# Altium PCB Laadstation.PcbDoc
Units mm, origin at the board's own origin, x right, y up, seen from the top; angles counter-clockwise.
Board outline 40.78 x 39.58 mm, 2 copper layers (Top Layer, Bottom Layer), stack 1.569 mm thick; 49 components, 36 nets, 217 pads, 36 vias.
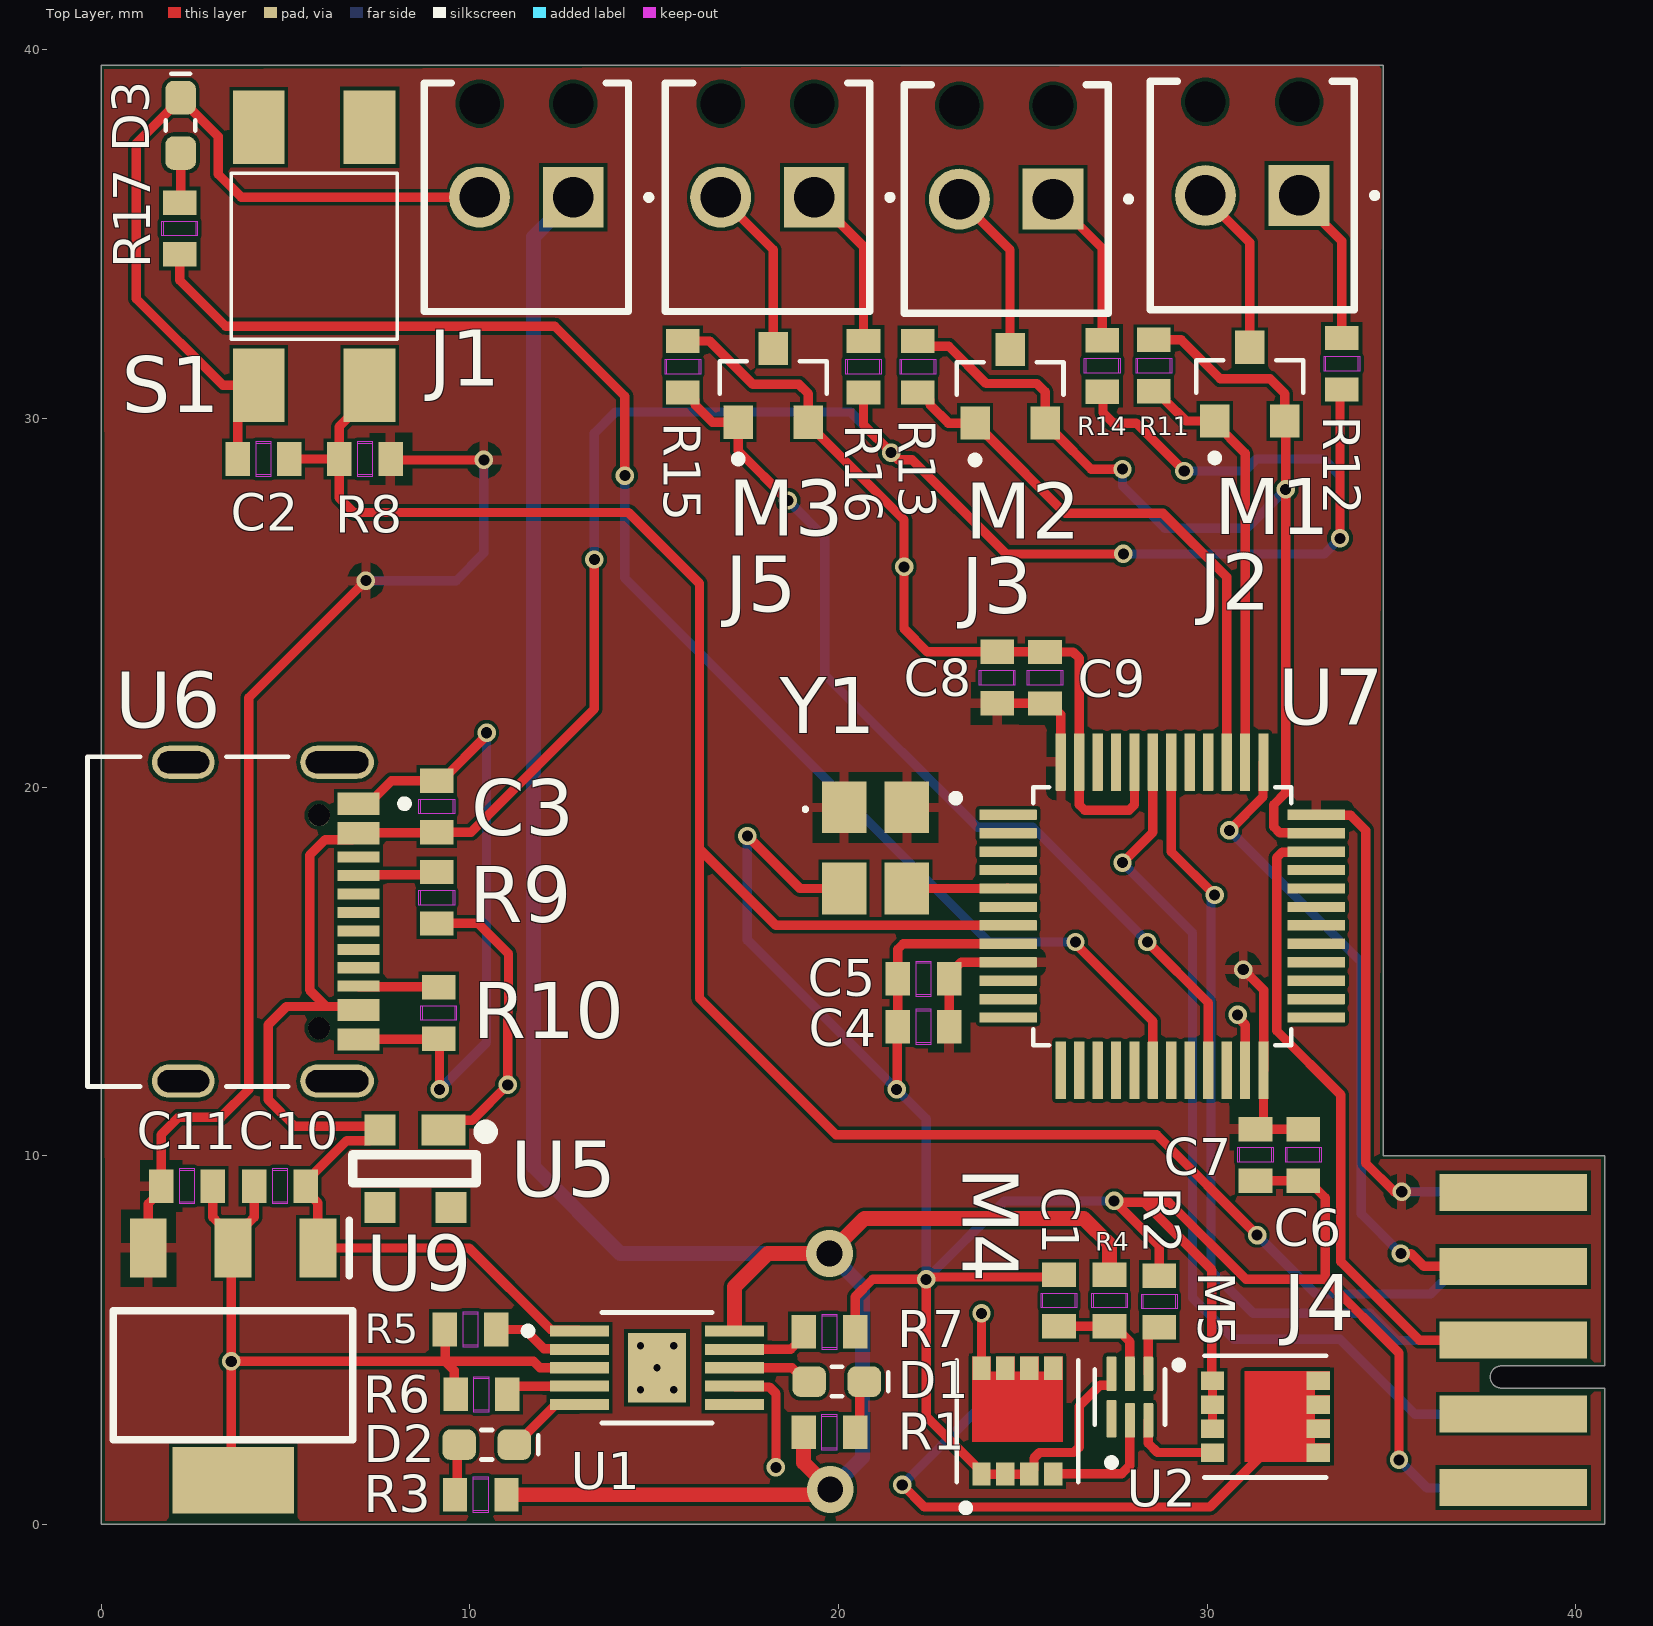
[diagram p0: Top Layer view]
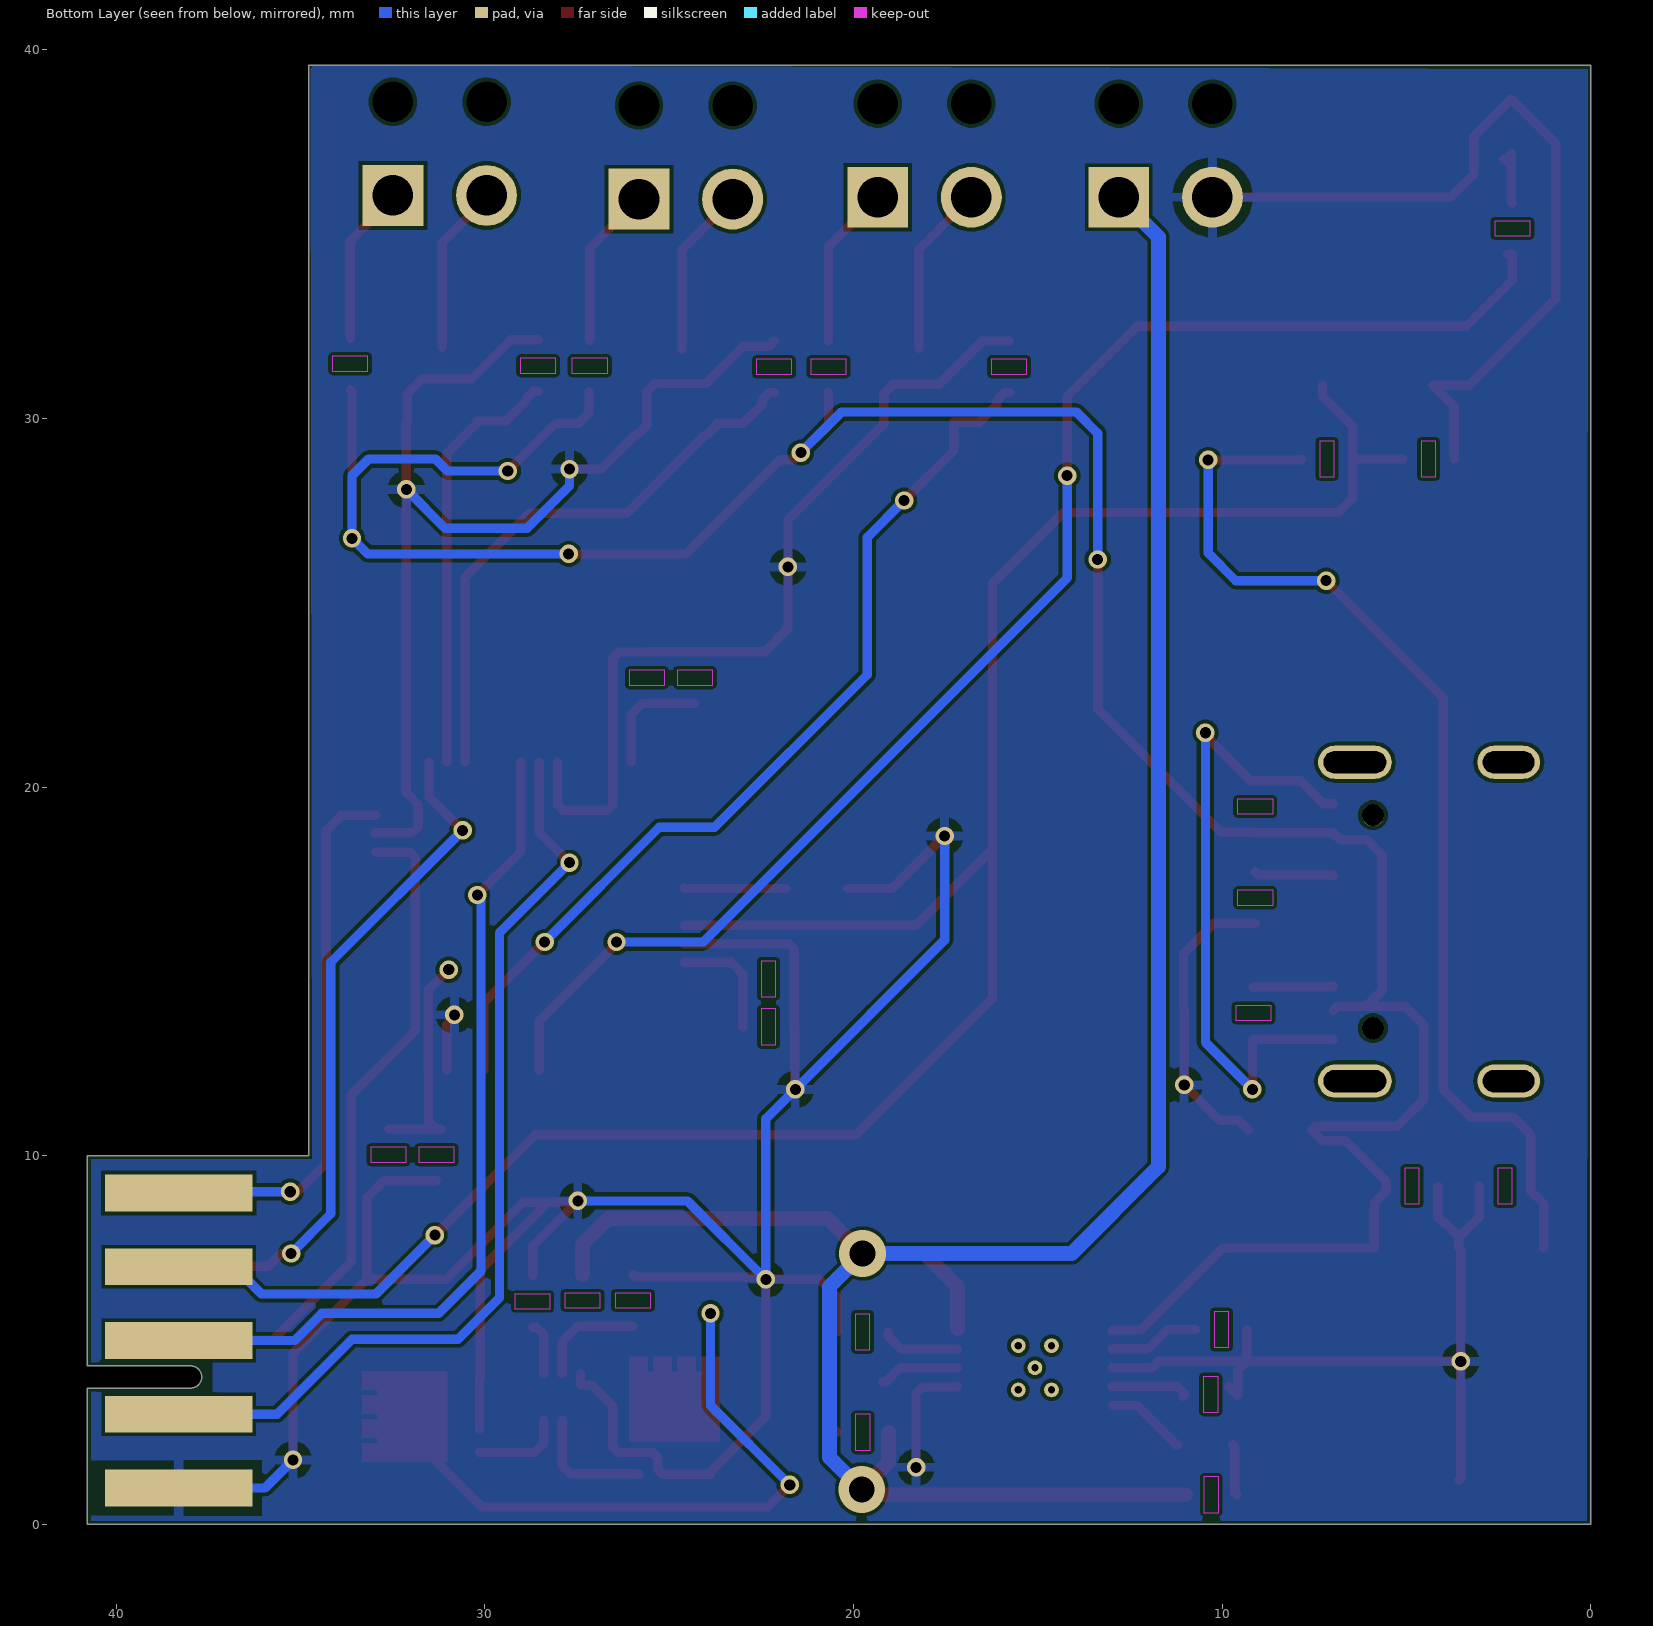
[diagram p1: Bottom Layer view, seen from below]
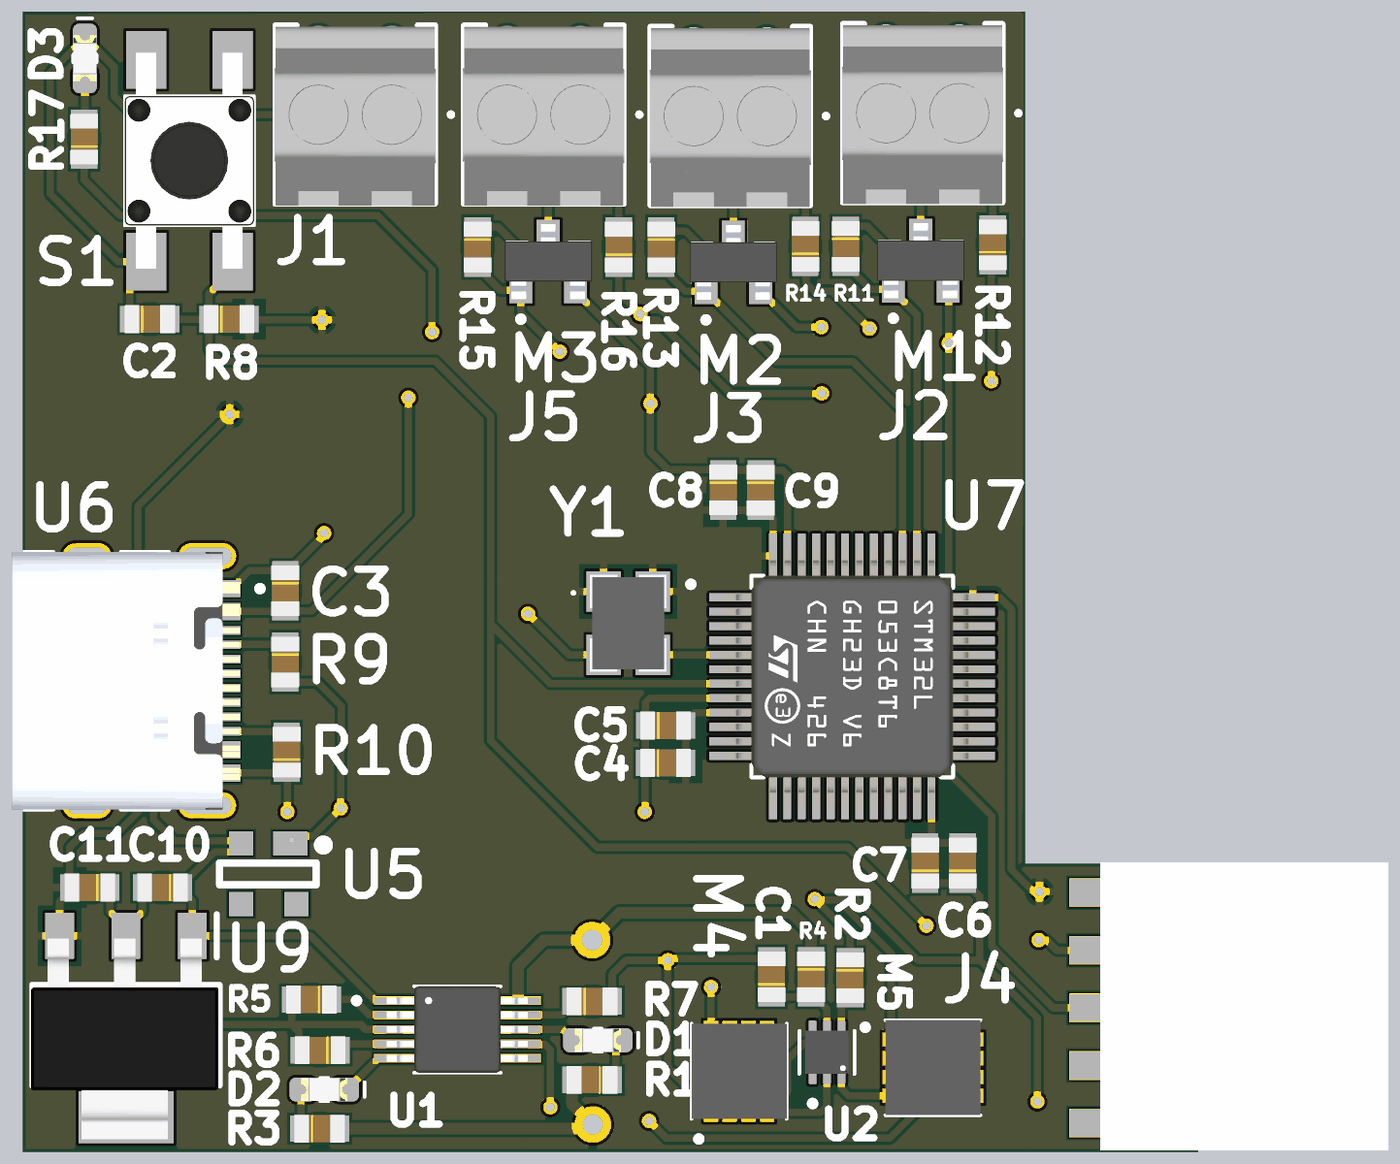
[diagram p2: 3D render of the assembled board from above, using the file's embedded part models]

## Layer stack, top to bottom
Top Solder: solder mask 0.0254, SM-001, Dk 4
Top Layer: signal copper 0.035
Dielectric 1: core 1.4986, Core-043, Dk 4.3
Bottom Layer: signal copper 0.035
Bottom Solder: solder mask 0.0254, SM-001, Dk 4

## Board outline
0,0 0,39.575 34.775,39.575 34.775,10 40.775,10 40.775,4.3 37.975,4.3 ccw(c37.975,4) 37.675,4 ccw(c37.975,4) 37.975,3.7 40.775,3.7 40.775,0 34.775,0

## Design rules (kind name [scope] priority, off if disabled: settings)
Clearance [All] p1: gap=0.1 ignorepadtopadclearanceinfootprint=FALSE
MinimumSolderMaskSliver [All] p1: minsoldermaskwidth=0.1
PolygonConnect [All] p1: connectstyle=Relief reliefconductorwidth=0.254 reliefentries=4 polygonreliefangle="90 Angle" airgapwidth=0.254
RoutingVias [All] p1: holewidth=0.711 width=1.27 viastyle="Through Hole" minholewidth=0.3 minwidth=0.5 maxholewidth=0.711 maxwidth=1.27
SilkToSilkClearance [All] p1: silktosilkclearance=0.05
SolderMaskExpansion [All] p1: expansion=0.102 istentingtop=FALSE
SupplyNets "Schematic Supply Nets_4" [InNet('VDD')] p1: voltage=0.000
SupplyNets "Schematic Supply Nets_3" [InNet('Battery')] p2: voltage=0.000
SupplyNets "Schematic Supply Nets_1" [InNet('VSS')] p3: voltage=0.000
SupplyNets "Schematic Supply Nets" [InNet('+5V')] p4: voltage=0.000
Width [All] p1: maxlimit=0.4 minlimit=0.254 preferedwidth=0.4
28 further rules are at their usual default settings.

## Classes and differential pairs
component class Oplader: C1 D1 D2 J1 M4 M5 R1 R2 R3 R4 R5 R6 R7 U1 U2
component class Laadstation: C2 C3 C4 C5 C6 C7 C8 C9 C10 C11 D3 J2 J3 J4 J5 M1 M2 M3 R8 R9 R10 R11 R12 R13 R14 R15 R16 R17 S1 U5 U6 U7 U9 Y1

## Components (designator, comment, footprint, x,y, rotation, side; value= is the part's Value field where it differs from the comment)
C1 "100nF" 0603 25.975,5.375 r90 top
C2 "100n" 0603 3.7,28.9 r0 top
C3 "1µF" 0603 9.1,20.175 r270 top
C4 "1µF" 0603 21.6,13.5 r0 top
C5 "100nF" 0603 21.603,14.8 r0 top
C6 "1µF" 0603 32.607,9.327 r90 top
C7 "100nF" 0603 31.307,9.327 r90 top
C8 "1µF" 0603 24.3,23.669 r270 top
C9 "100nF" 0603 25.6,23.666 r270 top
C10 "100nF" 0603 5.547,9.175 r180 top
C11 "10µF" 0603 3.022,9.175 r180 top
D1 "LED" LED 19.95,3.875 r180 top
D2 "LED" LED 10.455,2.163 r180 top
D3 "LED" LED 2.15,37.95 r270 top
J1 "MPT 0,5 2-2,54" "MPT 0,5 2-2,54" 12.8,36 r180 top
J2 "MPT 0,5 2-2,54" "MPT 0,5 2-2,54" 32.49,36.05 r180 top
J3 "MPT 0,5 2-2,54" "MPT 0,5 2-2,54" 25.815,35.95 r180 top
J4 "STLINK-V3MINIE" STLINK-V3MINIE 40.8,4 r180 top
J5 "MPT 0,5 2-2,54" "MPT 0,5 2-2,54" 19.34,36 r180 top
M1 "BSS316N" BSS316N 31.15,30.931 r90 top
M2 "BSS316N" BSS316N 24.65,30.875 r90 top
M3 "BSS316N" BSS316N 18.225,30.9 r90 top
M4 "CSD16406Q3" CSD16406Q3 24.85,2.8 r90 top
M5 "CSD16406Q3" CSD16406Q3 31.575,2.925 r0 top
R1 "1k5" 0603 20.447,2.5 r180 top
R2 "2k2" 0603 28.7,6.747 r270 top
R3 "1k5" 0603 9.595,0.805 r0 top
R4 "330R" 0603 27.35,6.775 r270 top
R5 "1k" 0603 10.712,5.29 r180 top
R6 "2k" 0603 11.009,3.529 r180 top
R7 "10k" 0603 19.05,5.225 r0 top
R8 "4k7" 0603 6.45,28.9 r0 top
R9 "5k1" 0603 9.1,17.7 r270 top
R10 "5k1" 0603 9.15,13.175 r90 top
R11 "weerstand" 0603 28.55,32.131 r270 top
R12 "39R" 0603 33.65,30.784 r90 top
R13 "weerstand" 0603 22.15,32.1 r270 top
R14 "39R" 0603 27.15,30.728 r90 top
R15 "weerstand" 0603 15.775,32.1 r270 top
R16 "39R" 0603 20.675,30.703 r90 top
R17 "330R" 0603 2.125,34.453 r90 top
S1 "button" BUTTON 5.775,34.3 r90 top
U1 "BQ24092DGQR" BQ24092DGQR 15.075,4.25 r0 top
U2 "BQ29700DSER" BQ29700DSER 27.9,3.455 r90 top
U5 "esd_ic" ESD_IC 8.525,9.65 r180 top
U6 "usb-c" USB-C 4.6,16.35 r270 top
U7 "STM32L053C8T6" STM32L053C8T6 28.775,16.5 r0 top
U9 "NCV4274C" NCV4274C 5.875,7.5 r270 top
Y1 "AU-24.000MBE-T" AU-24.000MBE-T 21,18.35 r270 top

## Footprints (in the part's own frame and the unit in brackets; to place one, negate y for a bottom-side part, rotate by r counter-clockwise, add the part's x,y. Pads: shape width x height; smd on the part's side, far side on the other; paste and mask are expansions set on the pad)
0603 [mil]
  rect 26x36 smd paste+0 mask+0: 1(0,0) 2(55,0)
  Top Layer keep-out region: 19.68,-17 19.68,17 35.43,17 35.43,-17
  Keep-Out Layer region: 19.68,-19 19.68,19 35.43,19 35.43,-19
  body extent -7,-19 62,19, height 35
AU-24.000MBE-T [mm]
  rect 1.4x1.2 smd: 1(-1.1,-0.85) 2(1.1,-0.85) 3(1.1,0.85) 4(-1.1,0.85)
  silkscreen extent -1.1,-1.95 -1,-1.85, body extent -1.68,-1.33 1.68,1.33, height 1.2
BQ24092DGQR [mm]
  rect 1.6x0.3 smd paste-0.025 mask+0.05: 1(-2.1,1) 2(-2.1,0.5) 3(-2.1,0) 4(-2.1,-0.5) 5(-2.1,-1) 6(2.1,-1) 7(2.1,-0.5) 8(2.1,0) 9(2.1,0.5) 10(2.1,1)
  rect 1.57x1.88 smd: 11(0,0)
  round 0.4 hole 0.2 mask+0: 12(-0.45,0.6) 13(0.45,0.6) 14(0,0) 15(-0.45,-0.6) 16(0.45,-0.6)
  silkscreen extent -3.6,-1.5 1.5,1.5, body extent -2.45,-1.5 2.45,1.5, height 1.1
BQ29700DSER [mm]
  rrect25% 1.02x0.27 smd: 1(-0.59,0.5)
  rrect25% 0.94x0.27 smd: 2(-0.63,0) 3(-0.63,-0.5) 4(0.63,-0.5) 5(0.63,0) 6(0.63,0.5)
  silkscreen extent -1.87,-0.95 0.75,0.96, body extent -0.75,-0.75 0.75,0.75, height 0.8
BSS316N [mm]
  rect 0.9x0.8 smd: 1(-1,0.95) 2(-1,-0.95) 3(1,0)
  silkscreen extent -2.1,-1.45 0.65,1.45, body extent -1.3,-1.53 1.3,1.52, height 1.3
BUTTON [mm]
  rect 2x1.4 smd: A1(-3.4,1.5) A2(3.6,1.5) B1(-3.4,-1.5) B2(3.6,-1.5)
  silkscreen extent -2.15,-2.25 2.35,2.25, body extent -3.65,-2.25 3.85,2.25, height 3.8
CSD16406Q3 [mm]
  rect 0.63x0.5 smd paste-1: 1(-1.435,0.975) 2(-1.435,0.325) 3(-1.435,-0.325) 4(-1.435,-0.975)
  rect 0.63x0.5 smd paste-1 mask+0: 5(1.435,-0.975) 6(1.435,-0.325) 7(1.435,0.325) 8(1.435,0.975)
  Top Layer region: 1.75,0.725 1.34,0.725 1.34,0.575 1.75,0.575 1.75,0.075 1.34,0.075 1.34,-0.075 1.75,-0.075 1.75,-0.575 1.34,-0.575 1.34,-0.725 1.75,-0.725 1.75,-1.225 -0.56,-1.225 -0.56,1.225 1.75,1.225
  silkscreen extent -2.45,-1.65 1.65,1.65, body extent -1.65,-1.65 1.65,1.65, height 1.1
ESD_IC [mil]
  rect 47x33 smd paste+0 mask+2: 1(-29.92,-41.34)
  rect 33x33 smd paste+0 mask+2: 2(37.8,-41.34) 3(37.8,41.34) 4(-37.79,41.34)
  silkscreen extent -80,-45 67,15
LED [mm]
  rrect53% 0.91x0.83 smd: A(0.75,0) C(-0.75,0)
  silkscreen extent -1.4,-0.4 0.14,0.4, body extent -0.8,-0.4 0.8,0.4, height 0.7
"MPT 0,5 2-2,54" [mm]
  rect 1.65x1.65 hole 1.1: 1(0,0)
  round 1.65 hole 1.1: 2(2.54,0)
  round 0.55 hole 1.1 unplated: MH1(0,-2.54) MH2(2.54,-2.54)
  silkscreen extent -2.1,-3.1 4.04,3.1, body extent -1.53,-3.05 4.07,3.15, height 8.5
NCV4274C [mm]
  rect 1.6x1 smd: 1(0,0) 2(0,-2.3) 3(0,-4.6)
  rect 1.8x3.3 smd: 4(6.3,-2.3)
  silkscreen extent -0.75,-5.55 5.2,0.95, body extent 0.09,-5.59 7.05,0.91, height 1.65
STLINK-V3MINIE [mm]
  rect 4x1 smd paste-0.025 mask+0.05: 1(2.5,3) 2(2.5,1) 3(2.5,-1) 4(2.5,-3) 5(2.5,-5)
  rect 4x1 smd far side paste-0.025 mask+0.05: 6(2.504,3.01) 7(2.504,1.01) 8(2.504,-0.99) 9(2.504,-2.99) 10(2.504,-4.99)
  body extent -6.57,-6.05 3.43,3.95, height 2.3
STM32L053C8T6 [mm]
  rrect7% 1.56x0.28 smd: 1(-4.18,2.75) 2(-4.18,2.25) 3(-4.18,1.75) 4(-4.18,1.25) 5(-4.18,0.75) 6(-4.18,0.25) 7(-4.18,-0.25) 8(-4.18,-0.75) 9(-4.18,-1.25) 10(-4.18,-1.75) 11(-4.18,-2.25) 12(-4.18,-2.75) 25(4.18,-2.75) 26(4.18,-2.25) 27(4.18,-1.75) 28(4.18,-1.25) 29(4.18,-0.75) 30(4.18,-0.25) 31(4.18,0.25) 32(4.18,0.75) 33(4.18,1.25) 34(4.18,1.75) 35(4.18,2.25) 36(4.18,2.75)
  rrect7% 0.28x1.56 smd: 13(-2.75,-4.18) 14(-2.25,-4.18) 15(-1.75,-4.18) 16(-1.25,-4.18) 17(-0.75,-4.18) 18(-0.25,-4.18) 19(0.25,-4.18) 20(0.75,-4.18) 21(1.25,-4.18) 22(1.75,-4.18) 23(2.25,-4.18) 24(2.75,-4.18) 37(2.75,4.18) 38(2.25,4.18) 39(1.75,4.18) 40(1.25,4.18) 41(0.75,4.18) 42(0.25,4.18) 43(-0.25,4.18) 44(-0.75,4.18) 45(-1.25,4.18) 46(-1.75,4.18) 47(-2.25,4.18) 48(-2.75,4.18)
  silkscreen extent -5.7,-3.5 3.5,3.5, body extent -4.5,-4.5 4.5,4.5, height 1.4
USB-C [mm]
  rect 0.6x1.14 smd mask+0.05: A1_B12(-3.2,2.375) A4_B9(-2.4,2.375) B1_A12(3.2,2.375) B4_A9(2.4,2.375)
  rect 0.3x1.14 smd mask+0.05: A5(-1.25,2.375) A6(-0.25,2.375) A7(0.25,2.375) A8(1.25,2.375) B5(1.75,2.375) B6(0.75,2.375) B7(-0.75,2.375) B8(-1.75,2.375)
  oval 0.9x2 hole 0.6 slot 1.7 at 90 deg: S1(-4.325,1.795) S2(4.325,1.795)
  oval 0.9x1.7 hole 0.6 slot 1.4 at 90 deg: S3(-4.325,-2.375) S4(4.325,-2.375)
  round 0.6 hole 0.6 unplated: ""(-2.89,1.305) ""(2.89,1.305)
  silkscreen extent -4.47,-4.97 4.47,3.73, body extent -4.47,-4.97 4.47,2.93, height 3.31

## Part data
C1 C2 C3 C6 C7 C8 C9: library part Condensator
C4 C5 C10 C11: library part cap
R1 R2 R3 R4 R5 R6 R7 R8 R9 R10 R12 R14 R16 R17: library part weerstand

## Via types
v1: diameter 0.5, hole 0.3, Top Layer to Bottom Layer, 34 vias
v2: diameter 1.27, hole 0.711, Top Layer to Bottom Layer, 1 vias
v3: diameter 1.27, hole 0.7, Top Layer to Bottom Layer, 1 vias

## Nets (pads, with @x,y where several pads share a name; then routed paths per layer and width w, separated by ;. In a path a pad name is that pad's centre, name@x,y a point inside that pad or via, vN(x,y) a via of type N, cw(c..) or ccw(c..) an arc to the next point about the centre after c; other vN are vias at no path point)
+5V: C3.2 C10.1 R12.1 R14.1 R16.1 U1.1 U5.2 U6.A4_B9 U6.B4_A9 U9.1 | length 79.7
  Top Layer w0.254: U6.B4_A9 6.875,14.05 6.1,14.05 ; U1.1 12.952,5.273 12.202,5.273 9.975,7.5 U9.1 5.875,8.72 5.547,9.048 C10.1 5.547,9.302 6.653,10.408 7.273,10.408 U5.2 7.465,10.8 5.25,10.8 4.525,11.525 4.525,13.551 5.024,14.05 6.1,14.05 ; v1(13.375,26.175) 13.375,22.125 10.028,18.778 C3.2 9.086,18.764 6.989,18.764 U6.A4_B9 6.802,18.577 6.077,18.577 5.65,18.15 5.65,14.5 6.1,14.05 ; R16.1 20.675,29.825 v1(21.425,29.075) 21.619,28.881 21.99,28.881 24.546,26.325 v1(27.725,26.325) ; R14.1@27.173,30.728 27.173,30.152 27.45,29.875 28.075,29.875 v1(29.375,28.575) ; v1(33.6,26.75) 33.6,30.734 R12.1
  Bottom Layer w0.254: v1(13.375,26.175) 13.375,29.6 13.95,30.175 20.325,30.175 v1(21.425,29.075) ; v1(27.725,26.325) 33.175,26.325 v1(33.6,26.75) 33.6,28.45 33.15,28.9 31.337,28.9 31.012,28.575 v1(29.375,28.575)
Battery: J1.1 R1.2 R3.2 R4.1 U1.10 | length 66.8
  Top Layer w0.4: R3.2 19.63,0.805 v3(19.775,0.95) 19.05,1.675 R1.2 ; U1.10@17.175,5.309 17.175,6.45 18.075,7.35 v2(19.75,7.35) 20.7,8.3 26.65,8.3 27.35,7.6 R4.1
  Bottom Layer w0.4: J1.1 11.725,34.925 11.725,9.7 14.075,7.35 v2(19.75,7.35) 20.65,6.45 20.65,1.825 v3(19.775,0.95)
CH1: M1.1 R11.2 U7.38 | length 11.6
  Top Layer w0.254: R11.2 28.677,30.734 28.88,30.531 28.88,30.47 29.419,29.931 M1.1 30.2,29.881 31.025,29.056 U7.38
CH2: M2.1 R13.2 U7.39 | length 15.6
  Top Layer w0.254: R13.2 22.277,30.703 22.48,30.5 22.48,30.373 22.978,29.875 M2.1 23.7,29.825 23.973,29.552 24.023,29.552 26.15,27.425 28.8,27.425 30.525,25.7 U7.39
CH3: M3.1 R15.2 U7.21 | length 25.6
  Top Layer w0.254: R15.2 15.902,30.703 16.105,30.5 16.105,30.373 16.578,29.9 M3.1 17.275,29.125 v1(18.625,27.775) ; v1(28.375,15.8) 30.025,14.15 U7.21
  Bottom Layer w0.254: v1(18.625,27.775) 19.625,26.775 19.625,23.05 23.765,18.91 25.265,18.91 v1(28.375,15.8)
NetC1_1: C1.1 R4.2 U2.5 | length 3
  Top Layer w0.254: C1.1 25.977,5.377 27.349,5.377 R4.2 27.477,5.378 27.9,4.955 U2.5
NetC3_1: C3.1 R10.1 U6.A1_B12 U6.B1_A12 | length 18.1
  Top Layer w0.254: U6.B1_A12 6.988,13.163 9.138,13.163 9.175,13.125 v1(9.175,11.8) ; U6.A1_B12 7.245,19.55 7.87,20.175 C3.1 9.227,20.175 10.45,21.398 v1(10.45,21.475)
  Bottom Layer w0.254: v1(9.175,11.8) 10.45,13.075 v1(10.45,21.475)
NetD1_A: D1.A U1.8 | length 2.2
  Top Layer w0.254: U1.8 18.735,4.25 19.11,3.875 D1.A
NetD1_C: D1.C R1.1 | length 1.5
  Top Layer w0.254: R1.1 20.574,2.627 20.574,3.749 D1.C
NetD2_A: D2.A R3.1 | length 1.4
  Top Layer w0.254: R3.1 9.65,0.86 9.65,2.108 D2.A
NetD2_C: D2.C U1.5 | length 2.2
  Top Layer w0.254: D2.C 11.238,2.163 12.302,3.227 U1.5@12.952,3.227
NetD3_A: D3.A R17.2 | length 1.4
  Top Layer w0.254: R17.2 2.15,35.875 D3.A ; D3.A@2.325,37 2.338,37.013 D3.A@2.355,37.03
NetJ2_1: J2.1 R12.2 | length 4.3
  Top Layer w0.254: J2.1@32.49,35.975 33.65,34.815 R12.2
NetJ2_2: J2.2 M1.3 | length 4.5
  Top Layer w0.254: J2.2@29.95,35.975 31.15,34.775 M1.3
NetJ3_1: J3.1 R14.2 | length 4.4
  Top Layer w0.254: J3.1 27.15,34.615 R14.2
NetJ3_2: J3.2 M2.3 | length 4.6
  Top Layer w0.254: J3.2 24.65,34.575 M2.3
NetJ5_1: J5.1 R16.2 | length 4.5
  Top Layer w0.254: J5.1 20.675,34.665 R16.2
NetJ5_2: J5.2 M3.3 | length 4.7
  Top Layer w0.254: J5.2 18.225,34.575 M3.3
NetM4_4: M4.4 U2.2 | length 3.4
  Top Layer w0.254: M4.4 25.835,1.375 27.675,1.375 27.9,1.6 U2.2
NetM4_5: M4.5 M4.6 M4.7 M4.8 M5.5 M5.6 M5.7 M5.8 | length 19.2
  Top Layer w0.254: v1(21.725,1.075) 22.325,0.475 30.075,0.475 31.55,1.95 M5.5 ; M4.8 v1(23.875,5.725)
  Bottom Layer w0.254: v1(21.725,1.075) 23.875,3.225 v1(23.875,5.725)
NetM5_4: M5.4 U2.3 | length 2.5
  Top Layer w0.254: U2.3 28.4,2.2 28.65,1.95 M5.4
NetR2_2: R2.2 U2.4 | length 1.4
  Top Layer w0.254: U2.4 28.4,5.147 28.603,5.35 R2.2
NetR5_1: R5.1 U1.2 | length 2.5
  Top Layer w0.254: R5.1 11.486,5.29 12.01,4.765 12.96,4.765 U1.2
NetR6_1: R6.1 U1.4 | length 2.1
  Top Layer w0.254: R6.1@11.059,3.479 R6.1 11.009,3.547 11.212,3.75 U1.4
NetR7_1: R7.1 U1.9 | length 2.1
  Top Layer w0.254: U1.9 18.702,4.75 19.05,5.098 R7.1
NetR9_1: R9.1 U6.A5 | length 2.2
  Top Layer w0.254: U6.A5 6.998,17.623 9.023,17.623 R9.1
NetR10_2: R10.2 U6.B5 | length 2.2
  Top Layer w0.254: U6.B5 6.989,14.586 9.136,14.586 R10.2
OSC: U7.5 Y1.3 | length 2.8
  Top Layer w0.254: Y1.3 U7.5 U7.5@24.582,17.263
RST: C2.2 J4.9 R8.1 S1.B1 U7.7 | length 61.7
  Top Layer w0.254: C2.2 R8.1 ; S1.B1 7.275,30.6 6.45,29.775 R8.1 ; U7.7 18.3,16.25 16.225,18.325 ; v1(31.35,7.85) 28.628,10.572 19.928,10.572 16.225,14.275 16.225,18.325 ; R8.1 6.45,27.85 6.85,27.45 14.3,27.45 16.225,25.525 16.225,18.325
  Bottom Layer w0.254: v1(31.35,7.85) 32.95,6.25 36.056,6.25 36.796,6.99 J4.9
RX: J4.7 U7.43 | length 25.7
  Top Layer w0.254: v1(27.7,17.95) 28.525,18.775 U7.43
  Bottom Layer w0.254: v1(27.7,17.95) 29.6,16.05 29.6,6.15 30.725,5.025 33.6,5.025 35.635,2.99 J4.7
STATUS: R17.1 U7.18 | length 39.8
  Top Layer w0.254: R17.1@2.252,34.453 R17.1 2.125,33.75 3.375,32.5 12.3,32.5 14.2,30.6 v1(14.2,28.45) ; v1(26.425,15.8) 26.425,15.75 28.525,13.65 U7.18
  Bottom Layer w0.254: v1(14.2,28.45) 14.2,25.675 24.075,15.8 v1(26.425,15.8)
SWCLK: J4.4 U7.37 | length 18.8
  Top Layer w0.254: v1(30.6,18.825) 31.512,19.737 31.512,20.667 U7.37 ; v1(35.25,7.35) 35.525,7.35 35.875,7 J4.4
  Bottom Layer w0.254: v1(30.6,18.825) 34.175,15.25 34.175,8.425 v1(35.25,7.35)
SWDIO: J4.3 U7.34 | length 18.4
  Top Layer w0.254: U7.34 32.942,18.237 32.035,18.237 31.886,18.088 31.886,13.389 33.625,11.65 33.625,7.125 35.75,5 J4.3
TX: J4.8 U7.42 | length 23.3
  Top Layer w0.254: U7.42 29.025,18.25 v1(30.2,17.075)
  Bottom Layer w0.254: v1(30.2,17.075) 30.1,16.975 30.1,6.875 31.25,5.725 34.419,5.725 35.154,4.99 J4.8
VDD: C4.2 C5.2 C6.2 C7.2 C8.2 C9.2 C11.2 J4.10 R8.2 U7.9 U7.24 U7.36 U7.48 U9.3 Y1.1 Y1.4 | length 57
  Top Layer w0.254: U9.3 1.275,8.698 1.625,9.048 C11.2 1.625,10.575 2.1,11.05 3.25,11.05 4,11.8 4,22.425 v1(7.175,25.6) ; R8.2 7.872,28.875 v1(10.375,28.875) ; C4.2 22.999,13.502 22.999,14.799 C5.2 23,14.927 23.323,15.25 U7.9 ; C8.2 24.302,22.271 25.599,22.271 C9.2 25.727,22.269 26.025,21.971 U7.48 ; v1(30.975,15.05) 30.978,15.05 31.532,14.496 U7.24@31.532,12.327 ; C7.2@31.18,10.724 C7.2 C7.2@31.322,10.724 ; U7.24 31.525,10.927 C7.2@31.322,10.724 ; C6.2 C7.2@31.322,10.724 ; U7.36 32.968,19.237 33.888,19.237 34.3,18.825 34.3,9.8 35.075,9.025 v1(35.275,9.025)
  Bottom Layer w0.254: v1(7.175,25.6) 9.625,25.6 10.375,26.35 v1(10.375,28.875) ; v1(35.275,9.025) 38.261,9.025 J4.10
VSS: C1.2 C2.1 C4.1 C5.1 C6.1 C7.1 C8.1 C9.1 C10.2 C11.1 D3.C J1.2 J4.6 M1.2 M2.2 M3.2 M4.1 M4.2 M4.3 M5.1 M5.2 M5.3 R2.1 R5.2 R6.2 R7.2 R9.2 R11.1 R13.1 R15.1 S1.A1 U1.3 U1.7 U2.6 U5.1 U7.8 U7.23 U7.35 U7.44 U7.47 U9.2 U9.4 Y1.2 | length 188.5
  Top Layer w0.254: C11.1 3.022,8.337 3.186,8.173 3.202,8.173 U9.2@3.575,7.8 ; U9.4 3.525,1.25 v1(3.525,4.425) v1@3.55,4.45 ; C2.1 3.702,28.902 3.702,30.327 S1.A1 3.3,30.9 0.95,33.25 0.95,37.46 2.15,38.66 2.165,38.66 3.175,37.65 3.175,36.625 3.8,36 J1.2 ; C10.2 4.15,8.337 3.986,8.173 3.948,8.173 U9.2@3.575,7.8 ; R9.2 10.222,16.303 11.047,15.478 11.047,13.943 11.025,13.921 v1(11.025,11.925) 10.066,10.966 9.551,10.966 U5.1 ; R5.2@9.313,5.288 R5.2 9.325,5.279 9.325,4.425 ; R6.2@9.586,3.504 9.575,3.515 9.575,4.175 9.325,4.425 ; R6.2@9.613,3.53 R6.2@9.815,3.732 ; U1.3 11.9,4.25 11.725,4.425 9.325,4.425 ; R15.1 16.5,32.1 17.675,30.925 18.925,30.925 19.175,30.675 M3.2 19.175,29.85 21.775,27.25 v1(21.775,25.975) 21.775,24.3 22.406,23.669 C8.1 24.302,23.668 25.599,23.668 C9.1 26.359,23.666 26.525,23.5 U7.47 26.525,19.525 26.675,19.375 27.875,19.375 28.025,19.525 U7.44 ; U1.7 17.198,3.727 18.123,3.727 18.3,3.55 v1(18.3,1.55) ; v1(17.525,18.675) 18.95,17.25 Y1.2 ; R7.2 20.447,6.172 20.925,6.65 v1(22.375,6.65) ; v1(21.575,11.8) 21.588,11.813 21.588,13.487 C4.1 21.602,13.502 21.602,14.799 C5.1 21.603,15.601 21.752,15.75 U7.8 ; R13.1 22.288,31.962 22.988,31.962 24,30.95 25.375,30.95 25.6,30.725 25.6,29.825 25.873,29.552 25.923,29.552 26.85,28.625 v1(27.7,28.625) ; C1.2 25.914,6.711 22.436,6.711 v1(22.375,6.65) ; U2.6 27.4,3.785 27.392,3.777 27.092,3.777 26.525,3.21 26.525,2.099 26.376,1.95 25.448,1.95 25.298,1.8 25.298,1.488 M4.3 M4.2 M4.1 23.875,1.43 22.375,2.93 v1(22.375,6.65) ; v1(27.475,8.775) v1@27.507,8.743 ; R11.1 29.294,32.131 30.35,31.075 31.7,31.075 32.1,30.675 M1.2 32.125,29.906 v1(32.125,28.075) 32.125,19.85 31.8,19.525 31.8,18.925 31.962,18.763 32.942,18.763 U7.35 U7.35@32.968,18.763 ; R2.1 28.7,7.55 v1@27.507,8.743 ; M5.3 M5.2 M5.1 30.125,3.915 30.125,6.9 28.282,8.743 ; v1(30.825,13.825) 30.825,13.758 31.025,13.558 U7.23 ; C7.1 32.734,9.327 33.2,8.86 33.2,6.65 ; v1(35.2,1.75) 35.2,4.65 33.2,6.65 ; v1@3.55,4.45 3.525,4.475 3.525,7.45 U9.2 U9.2@3.575,7.8 ; v1@3.55,4.45 3.575,4.425 9.325,4.425 ; v1@27.507,8.743 28.282,8.743 ; 28.282,8.743 28.957,8.743 31.05,6.65 33.2,6.65
  Bottom Layer w0.254: v1(17.525,18.675) 17.525,15.85 v1(21.575,11.8) 22.375,11 v1(22.375,6.65) ; v1@22.362,6.663 v1(22.375,6.65) ; v1(27.475,8.775) 24.5,8.775 v1(22.375,6.65) ; v1(27.7,28.625) 27.7,28.175 28.85,27.025 31.075,27.025 v1(32.125,28.075) ; v1(35.2,1.75) 35.96,0.99 J4.6
pads on no net: J1.MH1 J1.MH2 J2.MH1 J2.MH2 J3.MH1 J3.MH2 J4.1 J4.2 J4.5 J5.MH1 J5.MH2 S1.A2 S1.B2 U1.6 U1.11 U1.12 U1.13 U1.14 U1.15 U1.16 U2.1 U5.3 U5.4 U6. U6.A6 U6.A7 U6.A8 U6.B6 U6.B7 U6.B8 U6.S1 U6.S2 U6.S3 U6.S4 U7.1 U7.2 U7.3 U7.4 U7.6 U7.10 U7.11 U7.12 U7.13 U7.14 U7.15 U7.16 U7.17 U7.19 U7.20 U7.22 U7.25 U7.26 U7.27 U7.28 U7.29 U7.30 U7.31 U7.32 U7.33 U7.40 U7.41 U7.45 U7.46

## Polygon pours and split planes (outlines as drawn)
VSS on Bottom Layer "VSS_L02_P003" (solid, pour order 3): 0.075,39.475 34.725,39.575 34.675,9.9 40.675,9.9 40.675,0.1 0.1,0.1
VDD on Top Layer "VDD_L01_P000" (solid, pour order 0): 0.075,39.475 34.725,39.575 34.675,9.9 40.675,9.9 40.675,0.1 0.1,0.1

## Other copper
Multi-Layer:
  pour cut-out: 40.675,4.4 37.375,4.4 37.375,3.6 40.675,3.6

## Silkscreen, mask and mechanical layers (free items; w line width, h text height)
Mechanical 1:
  lines w0.2: 0,0 34.775,0 40.775,0 40.775,3.7 38,3.7 cw(c38,4) 37.7,4 cw(c38,4) 38,4.3 40.775,4.3 40.775,10 34.775,10 34.775,39.575 0,39.575 0,0

## Dimensions
47.825,3.95 to 51.65,3.975 on Mechanical 1